# Altium PCB PCB2.PcbDoc
Units mil, origin at the board's own origin, x right, y up, seen from the top; angles counter-clockwise.
Board outline 3425 x 1435 mil, 2 copper layers (Top Layer, Bottom Layer); 12 components, 6 nets, 29 pads, 0 vias.
Unrouted connection lines stored in the file: 1.
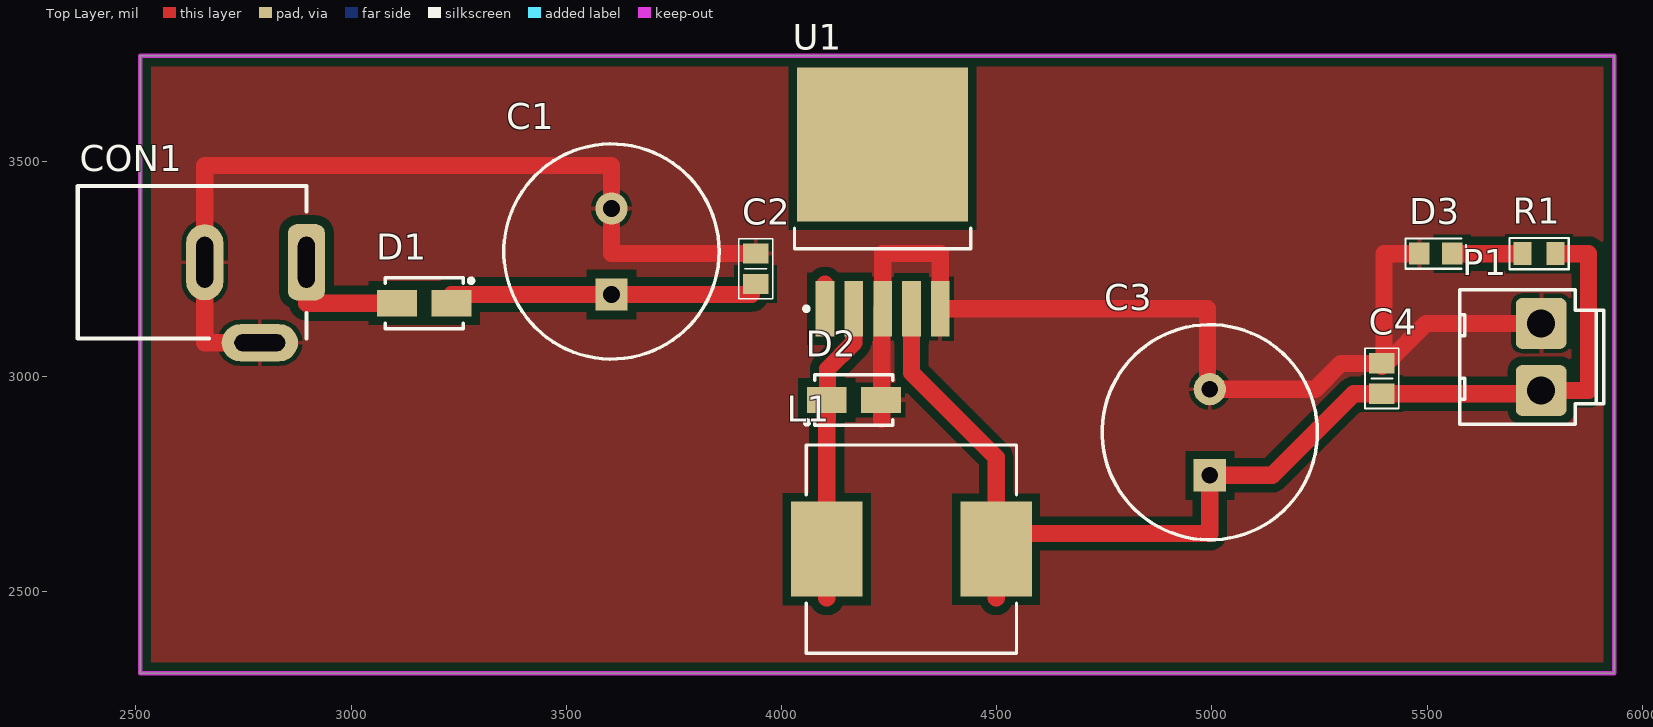
[diagram p0: Top Layer view]
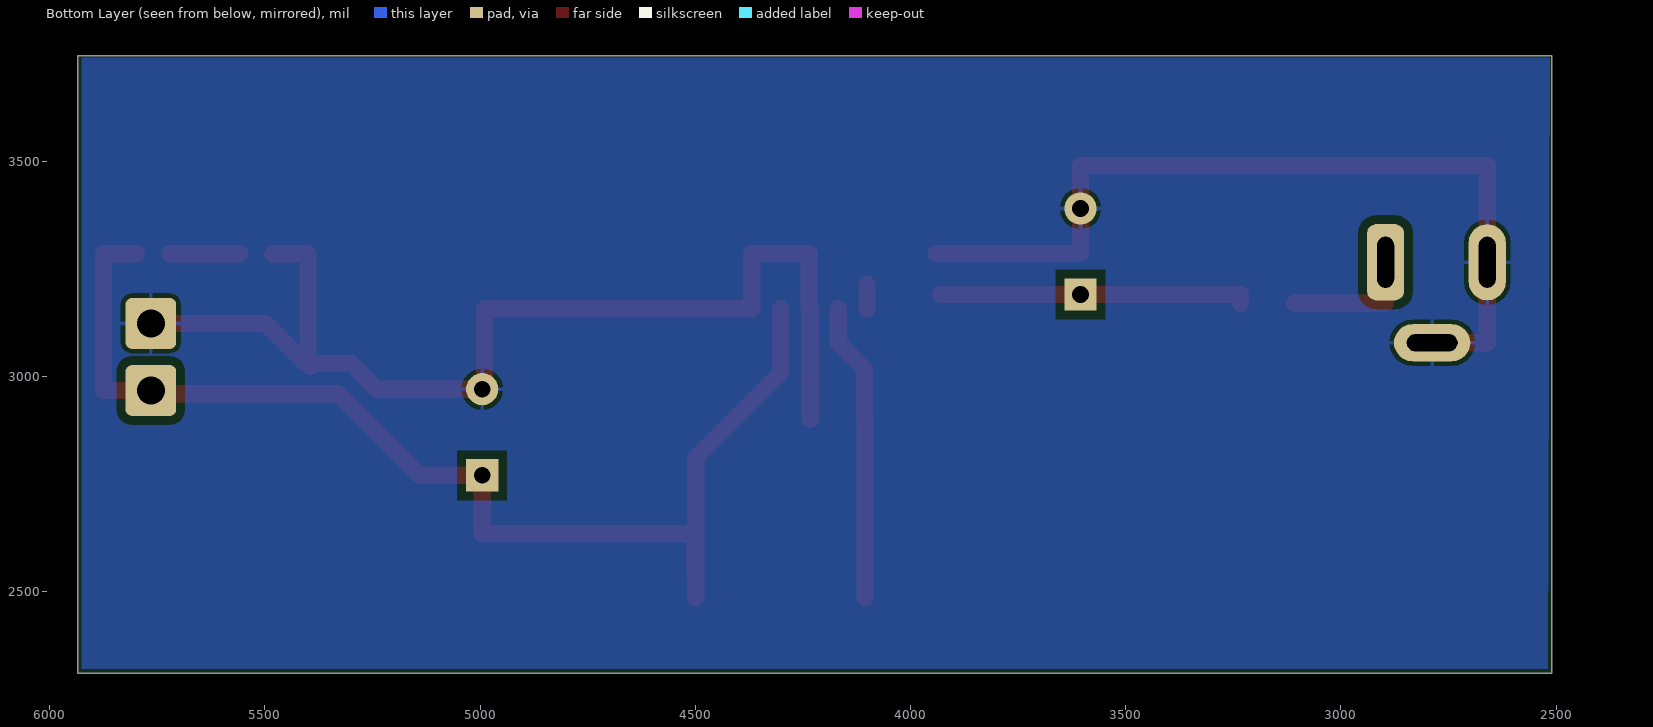
[diagram p1: Bottom Layer view, seen from below]
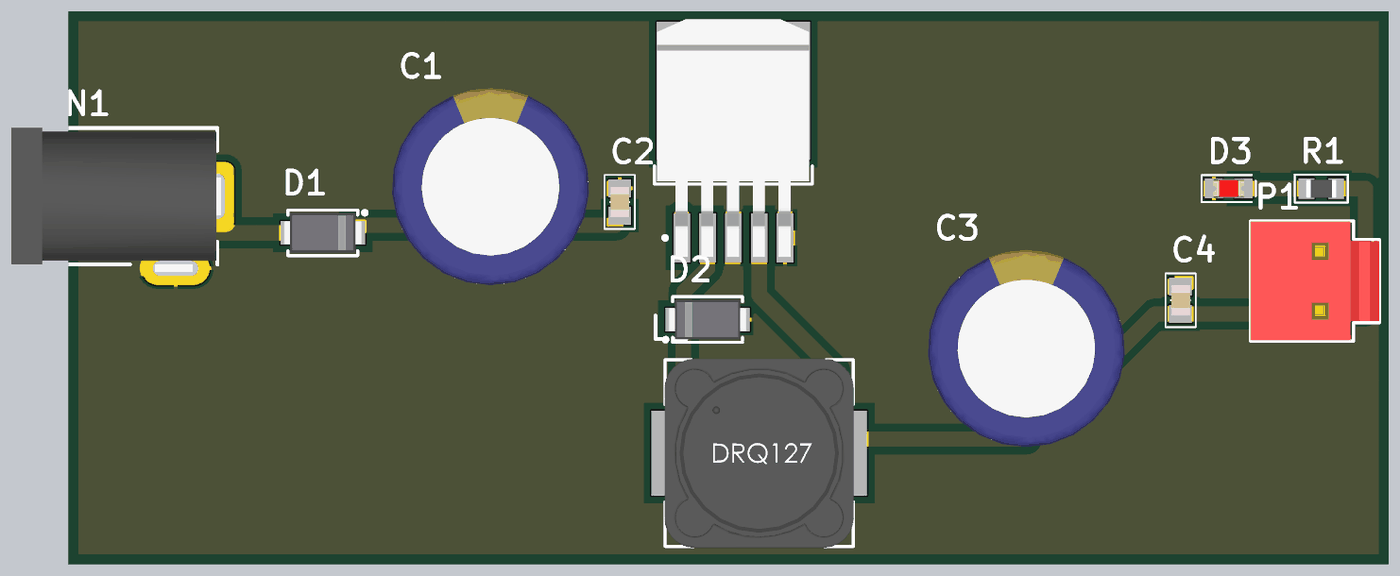
[diagram p2: 3D render of the assembled board from above, using the file's embedded part models]

## Layer stack, top to bottom
Top Solder: solder mask 0.4, Solder Resist, Dk 3.5
Top Layer: signal copper 1.4
Dielectric 1: dielectric 12.6, FR-4, Dk 4.8
Bottom Layer: signal copper 1.4
Bottom Solder: solder mask 0.4, Solder Resist, Dk 3.5

## Board outline
2510,2310 5935,2310 5935,3745 2510,3745

## Design rules (kind name [scope] priority, off if disabled: settings)
Clearance [All] p1: gap=20 ignorepadtopadclearanceinfootprint=FALSE
PolygonConnect [All] p1: connectstyle=Relief reliefconductorwidth=10 reliefentries=4 polygonreliefangle="90 Angle" airgapwidth=10
RoutingVias [All] p1: holewidth=28 width=50 viastyle="Through Hole" minholewidth=28 minwidth=50 maxholewidth=28 maxwidth=50
SolderMaskExpansion [All] p1: expansion=4
Width [All] p1: maxlimit=100 minlimit=20 preferedwidth=40
30 further rules are at their usual default settings.

## Components (designator, comment, footprint, x,y, rotation, side; value= is the part's Value field where it differs from the comment)
C1 "680uF" CYL/D.500/LS.200 3605,3290 r90 top
C2 "0.1uF" "C 0805" 3940,3250 r90 top
C3 "220uF" CYL/D.500/LS.200 4995,2870 r90 top
C4 "0.1uF" "C 0805" 5395,2995 r90 top
CON1 "CON DC PWR" CONN/DC/PWR/5.0MM 2896.22,3265 r0 top
D1 "SS34" "DO-214AC (SMA)" 3170,3170 r0 top
D2 "1N5824" "DO-214AC (SMA)" 4168.07,2945 r180 top
D3 "Led" "Led 0805 RED" 5520,3285 r180 top
L1 "33uH" "Inductor SMD 12x12x8" 4301.93,2598.38 r0 top
P1 "Header 2" HDR/Header/2/VH 5765,3045 r90 top
R1 "1k" "R 0805" 5760,3285 r0 top
U1 "LM2596S-5.0" TO-263-5 4235,3405 r90 top

## Footprints (in the part's own frame and the unit in brackets; to place one, negate y for a bottom-side part, rotate by r counter-clockwise, add the part's x,y. Pads: shape width x height; smd on the part's side, far side on the other; paste and mask are expansions set on the pad)
"C 0805" [mm] "Chip Capacitor, 2-Leads, Body 2.0x1.3mm, IPC Medium Density"
  rect 1.2x1.5 smd: 1(-0.9,0) 2(0.9,0)
  silkscreen extent -1.78,-1 1.78,1, body extent -1,-0.64 1,0.61, height 0.6
CONN/DC/PWR/5.0MM [mm]
  rrect50% 2.2x4.5 hole 1 slot 3 at 90 deg: 1(0,0)
  oval 2.2x4.5 hole 1 slot 3 at 90 deg: 2(-6,0)
  oval 4.5x2.2 hole 1 slot 3 at 0 deg: 3(-2.75,-4.75)
  silkscreen extent -13.5,-4.5 0,4.5, body extent -13.58,-5 0.25,4.5, height 11.02
CYL/D.500/LS.200 [mil]
  rect 75x75 hole 39: 1(-100,0)
  round 75 hole 39: 2(100,0)
  silkscreen extent -250,-250 250,250, body extent -256,-255 254,255, height 866
"DO-214AC (SMA)" [mm] "Molded Diode, 2-Leads, Body 4.3x2.7mm, IPC Medium Density"
  rect 2.35x1.55 smd: 1(-1.6,0) 2(1.6,0)
  silkscreen extent -2.3,-1.5 2.89,1.5, body extent -2.6,-1.3 2.6,1.3, height 2.4
HDR/Header/2/VH [mm]
  rrect25% 3x3 hole 1.65: 1(-1.98,0) 2(1.98,0)
  silkscreen extent -3.96,-3.7 3.96,4.8, body extent -3.93,-3.7 3.93,4.8, height 10.6
"Inductor SMD 12x12x8" [mm] "Precision Wire Wound Inductor, 2-Leads, Body 12.3x12.3mm, IPC Low Density"
  rect 4.2x5.6 smd: 1(-5,0) 2(5,0)
  silkscreen extent -6.2,-6.15 6.2,6.15, body extent -6.25,-6.25 6.25,6.25, height 8.01
"Led 0805 RED" [mm] "Led SMD 0805"
  rect 1.2x1.3 smd: 1(-0.975,0) 2(0.975,0)
  silkscreen extent -1.78,-0.89 1.78,0.89, body extent -1.01,-0.63 1.01,0.62, height 1.1
"R 0805" [mm] "Chip Resistor, 2-Leads, Body 2.0x1.3mm, IPC Medium Density"
  rect 1.05x1.35 smd: 1(-0.975,0) 2(0.975,0)
  silkscreen extent -1.75,-0.92 1.75,0.92, body extent -1,-0.61 1,0.59, height 0.5
TO-263-5 [mm] "D2-PAK, 6-Pads, Body 8.9x10.4mm (max), IPC Medium Density"
  rect 3.25x1.1 smd: 1(-6.3,3.4) 2(-6.3,1.7) 3(-6.3,0) 4(-6.3,-1.7) 5(-6.3,-3.4)
  rect 9.1x10.1 smd: 6(3.4,0)
  silkscreen extent -6.42,-5.2 -1.55,5.2, body extent -7.56,-4.98 8.11,5.02, height 4.83

## Part data
C1 C3: library part Capacitor, "Capacitor pol"
C2 C4: library part "Capacitor NP", "Capacitor non-pol"
CON1: "DC input connector"
D1: library part Diode, "Default Diode"
D2: library part "Diode Schottky", "Schottky Diode"
D3: "Typical LED"
L1: library part Inductor, "Inductor"
P1: "Header, 2-Pin"
R1: library part Resistor, "Resistor"
U1: "Simple Switcher 3A Step-Down Voltage Regulator"

## Nets (pads, with @x,y where several pads share a name; then routed paths per layer and width w, separated by ;. In a path a pad name is that pad's centre, name@x,y a point inside that pad or via, vN(x,y) a via of type N, cw(c..) or ccw(c..) an arc to the next point about the centre after c; other vN are vias at no path point)
5V: C3.1 C4.1 L1.2 P1.1 R1.2 U1.4 | length 2819.5
  Top Layer w40: U1.4 4301.93,3008.07 4498.78,2811.22 4498.78,2485 ; L1.2@4501.85,2553.38 4501.85,2635 4995,2635 C3.1 5140,2770 5329.57,2959.57 C4.1 5757.52,2959.57 P1.1 5875,2967.05 5875,3285 R1.2
GND: C1.2 C2.2 C3.2 C4.2 CON1.2 CON1.3 D2.1 D3.2 P1.2 U1.3 U1.5 | length 4659.6
  Top Layer w40: CON1.3 2660,3077.99 CON1.2 2660,3490 3605,3490 C1.2 3605,3285.43 C2.2 ; 4232.99,2900 4232.99,3156.97 U1.3 4235,3285.43 4368.86,3285.43 U1.5 4990,3156.97 4990,2970 C3.2 5240,2970 5300,3030 5388.19,3030 C4.2@5395,3023.19 ; C4.2 C4.2@5400,3030.43 ; D3.2 5400,3285 C4.2@5400,3030.43 ; P1.2 5497.95,3122.95 5405.43,3030.43 C4.2@5400,3030.43
NetC1_1: C1.1 C2.1 D1.2 U1.1 | length 774.6
  Top Layer w40: D1.2 3232.99,3190 C1.1 3930,3190 ; U1.1 U1.1@4101.14,3214.57
NetCON1_1: CON1.1 D1.1 | length 305.8
  Top Layer w40: CON1.1 2896.22,3170 D1.1
NetD2_2: D2.2 L1.1 U1.2 | length 698.1
  Top Layer w40: 4105.08,2485 4105.08,2898.07 4107.01,2900 4107.01,3017.01 4168.07,3078.07 U1.2
NetD3_1: D3.1 R1.1 | length 163.2
  Top Layer w40: D3.1 R1.1
pads on no net: U1.6

## Polygon pours and split planes (outlines as drawn)
GND on Top Layer (solid, remove dead copper, pour order 0): 2510,3745 5935,3745 5935,2310 2510,2310
GND on Bottom Layer (solid, remove dead copper, pour order 2): 2515,3740 5925,3740 5925,2320 2520,2320 2520,2315

## Keep-outs
Top Layer:
  lines w10: 2510,2310 5935,2310 5935,2435 5935,3745 5875,3745 2510,3745 2510,2310